# Altium PCB PCB2.PcbDoc
Units mil, origin at the board's own origin, x right, y up, seen from the top; angles counter-clockwise.
Board outline 6000 x 4000 mil, 2 copper layers (Top Layer, Bottom Layer); 33 components, 88 nets, 249 pads, 102 vias.
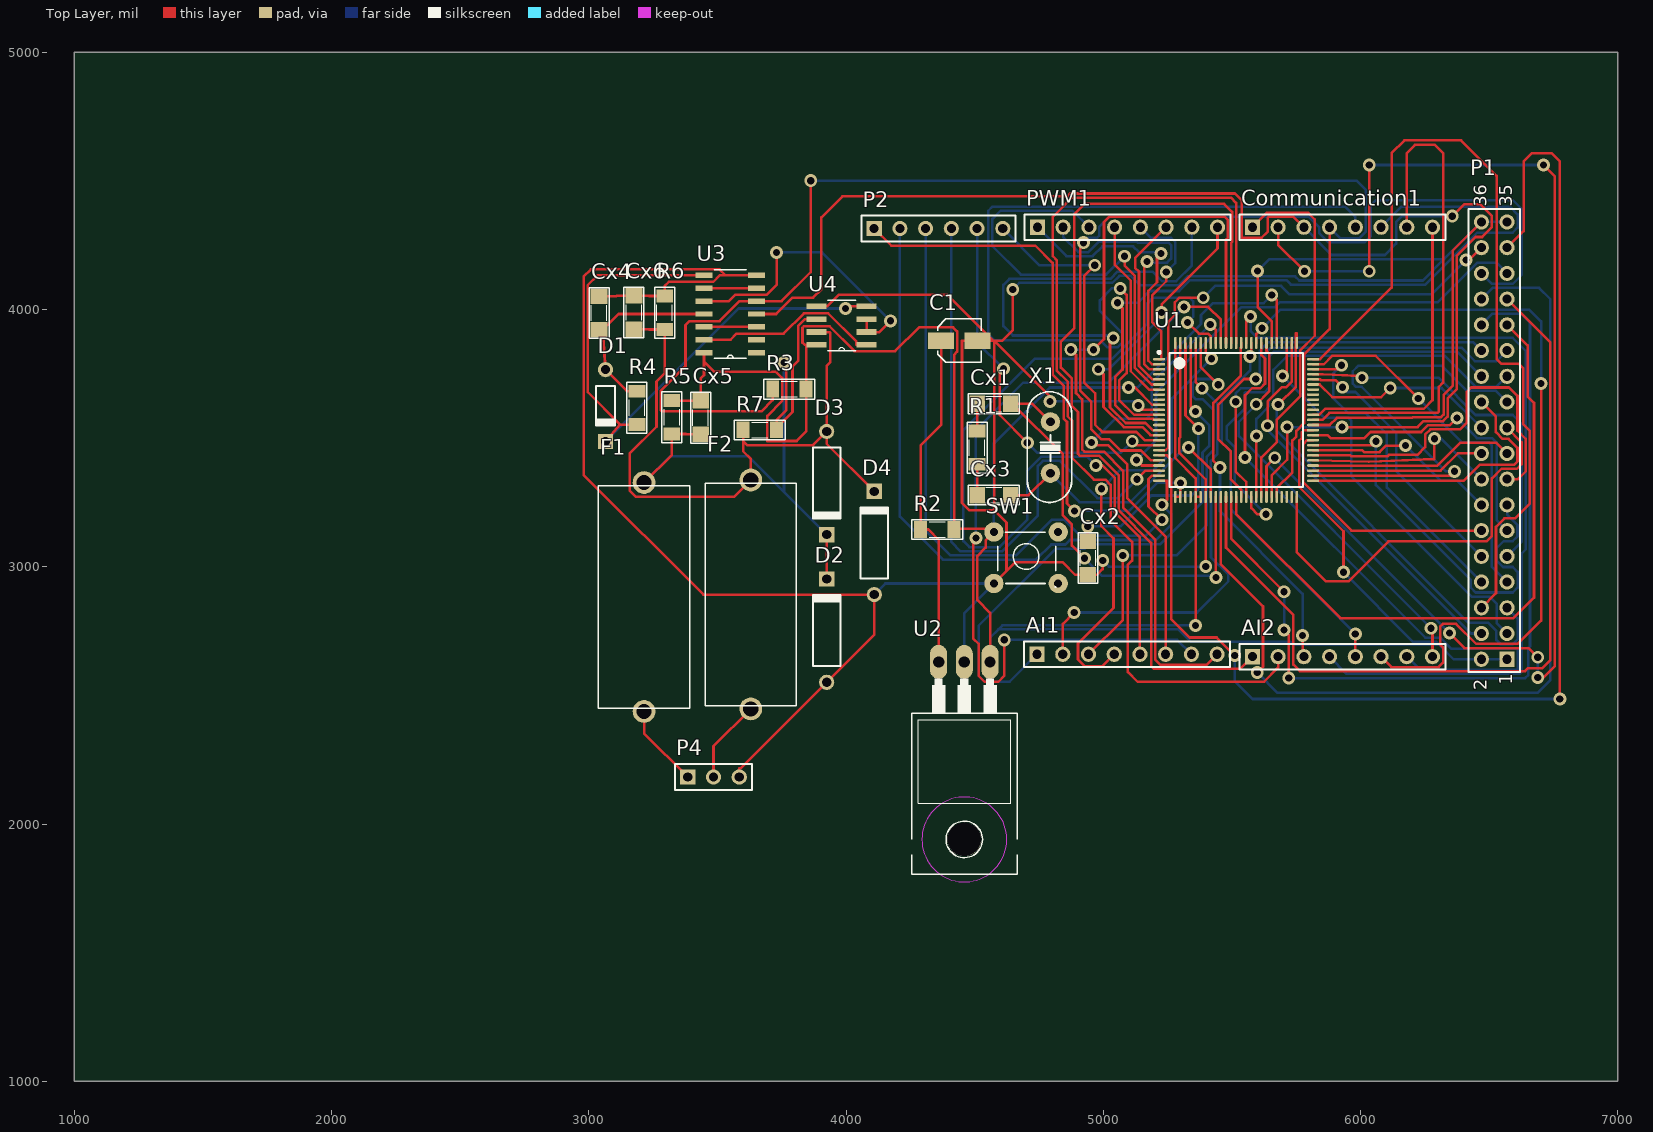
[diagram p0: Top Layer view]
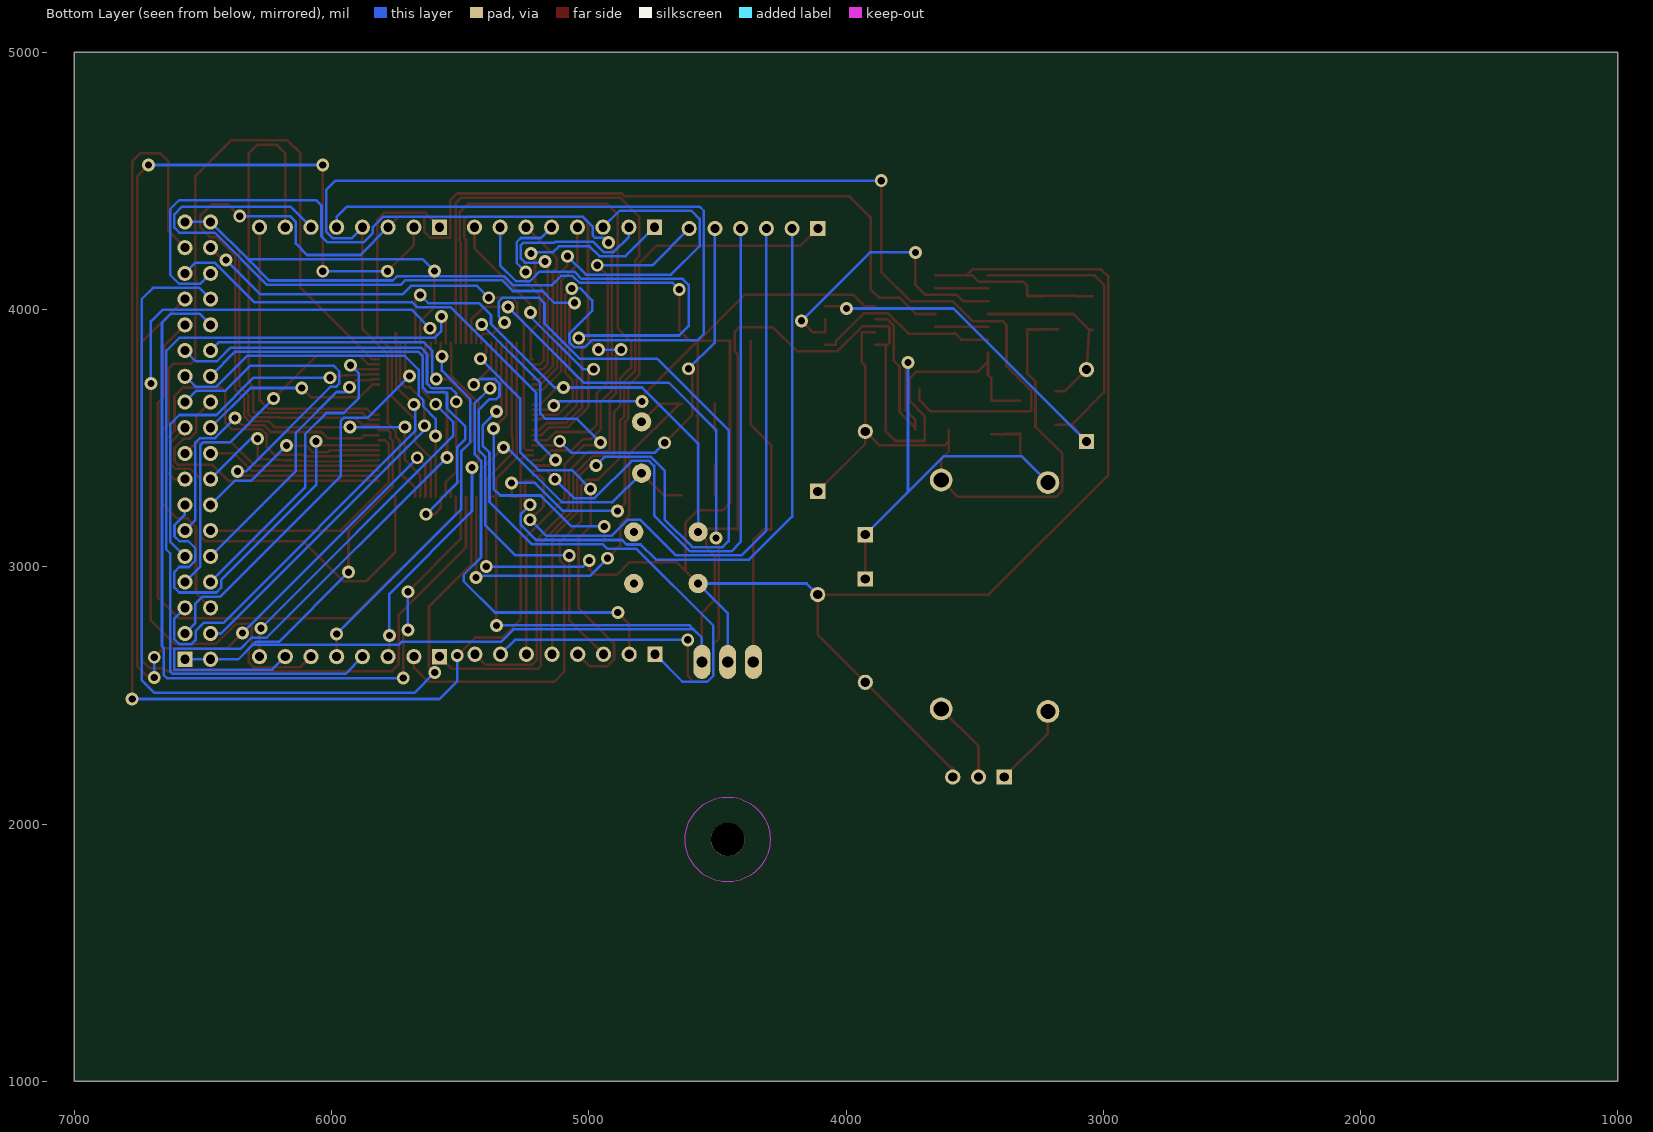
[diagram p1: Bottom Layer view, seen from below]
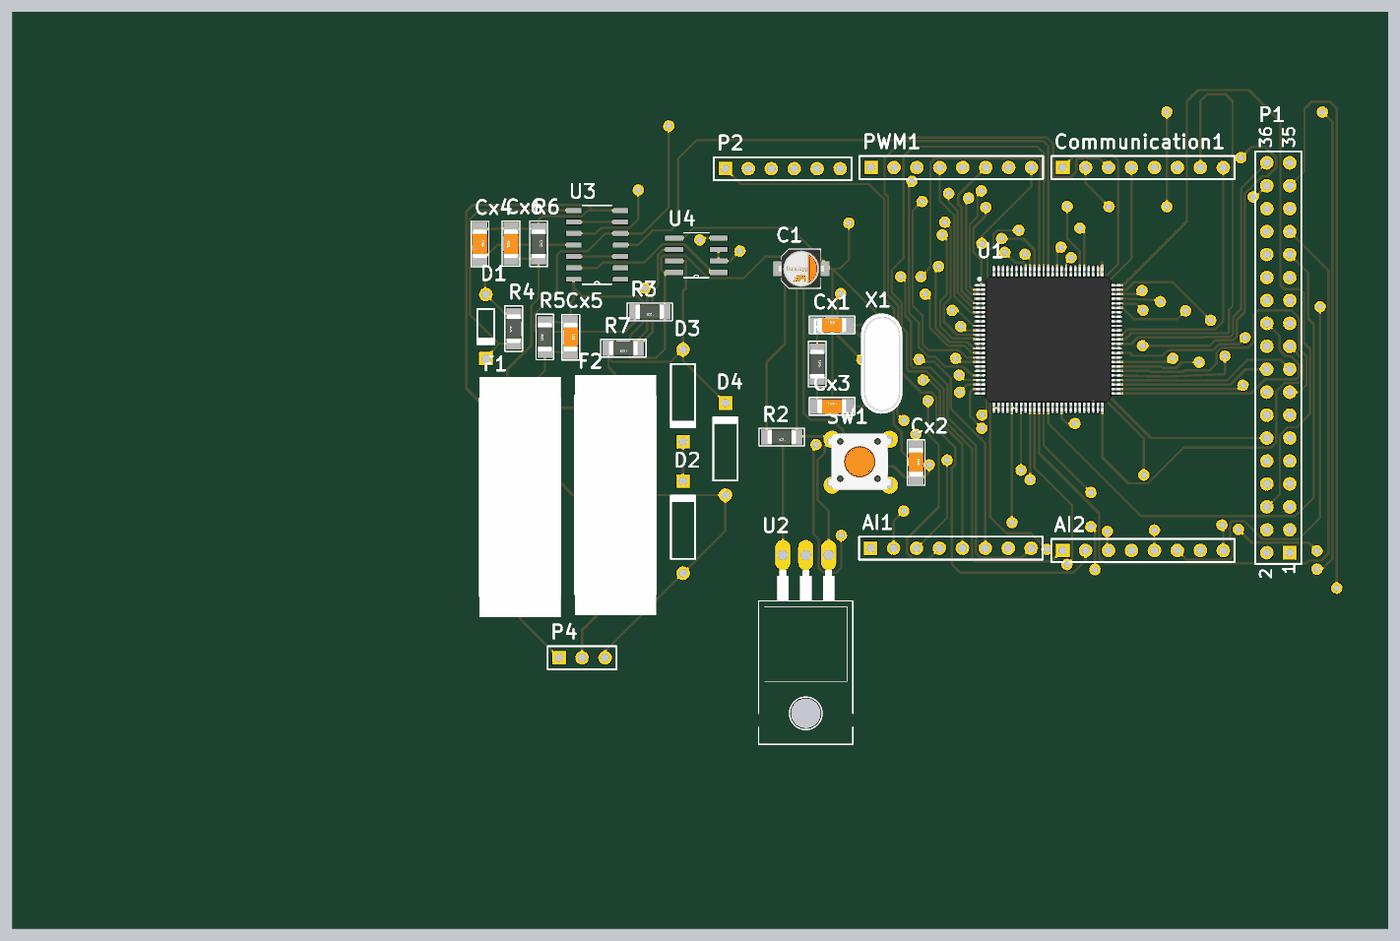
[diagram p2: 3D render of the assembled board from above, using the file's embedded part models]

## Layer stack, top to bottom
Top Solder: solder mask 0.4, Solder Resist, Dk 3.5
Top Layer: signal copper 1.4
Dielectric 1: dielectric 12.6, FR-4, Dk 4.8
Bottom Layer: signal copper 1.4
Bottom Solder: solder mask 0.4, Solder Resist, Dk 3.5

## Board outline
1000,1000 7000,1000 7000,5000 1000,5000

## Design rules (kind name [scope] priority, off if disabled: settings)
Clearance [All] p1: gap=6 ignorepadtopadclearanceinfootprint=FALSE
PolygonConnect [All] p1: connectstyle=Relief reliefconductorwidth=10 reliefentries=4 polygonreliefangle="90 Angle" airgapwidth=10
RoutingVias [All] p1: holewidth=28 width=50 viastyle="Through Hole" minholewidth=28 minwidth=50 maxholewidth=28 maxwidth=50
ShortCircuit [All] p1: allowed=TRUE
SolderMaskExpansion [All] p1: expansion=4
UnRoutedNet [All] p1: checkbadconnections=TRUE
Width [All] p1: maxlimit=10 minlimit=10 preferedwidth=10
28 further rules are at their usual default settings.

## Classes and differential pairs
component class "U_Module RS485": Cx4 Cx5 Cx6 D1 D2 D3 D4 F1 F2 P4 R3 R4 R5 R6 R7 U3 U4
component class U_Sheet1: AI1 AI2 C1 Communication1 Cx1 Cx2 Cx3 P1 P2 PWM1 R1 R2 SW1 U1 U2 X1

## Components (designator, comment, footprint, x,y, rotation, side; value= is the part's Value field where it differs from the comment)
AI1 "Header 8" HDR1X8 4742.76,2660 r0 top
AI2 "Header 8" HDR1X8 5580,2650.48 r0 top
C1 "CN-ALU-SMD" CAP-ALU-SMD-4.5x5x1.4 4440.47,3878.79 r0 top
Communication1 "Header 8" HDR1X8 5580,4320 r0 top
Cx1 "XXpF" CN-SMD-1206 4573.52,3633.34 r0 top value=22pF
Cx2 "XXpF" CN-SMD-1206 4940,3035 r270 top value=33pF
Cx3 "XXpF" CN-SMD-1206 4573.52,3278.34 r0 top value=22pF
Cx4 "XXpF" CN-SMD-1206 3040,3987.5 r270 top value=33pF
Cx5 "" CN-SMD-1206 3435,3581.01 r270 top value=1nF
Cx6 "" CN-SMD-1206 3175.48,3987.5 r90 top value=1nF
D1 "Diode 1N4148" DO-35 3065,3626.5 r270 top
D2 "Tranzorb" DO-7 3925,2751.71 r90 top
D3 "Tranzorb" DO-7 3925,3325.5 r270 top
D4 "Tranzorb" DO-7 4110,3092.5 r90 top
F1 "F1A" Fuse3 3215,2882.5 r270 top value=Fuse
F2 "F1A" Fuse3 3630,2892.5 r270 top value=Fuse
P1 "Header 18X2" HDR2X18 6570,2640.48 r90 top
P2 "Header 6" HDR1X6 4109.53,4315 r0 top
P4 "Header 3" HDR1X3 3385,2182.5 r0 top
PWM1 "Header 8" HDR1X8 4744.33,4320 r0 top
R1 "Res" RES-SMD-1206 4509.53,3463.34 r270 top value=1K
R2 "Res" RES-SMD-1206 4355,3145 r180 top
R3 "Res" RES-SMD-1206 3780,3691 r180 top value=10k
R4 "1K" RES-SMD-1206 3187.15,3617.5 r90 top
R5 "" RES-SMD-1206 3322.85,3581.01 r90 top value=1k
R6 "" RES-SMD-1206 3295,3987.5 r270 top value=1k
R7 "120" RES-SMD-1206 3665,3532.5 r180 top
SW1 "SW" SW2-DIP 4575,3135 r0 top value="Button chip 4 pin"
U1 "ATmega2560-AU" TQFP100L 5516.57,3570.8 r0 top
U2 "LM7805" *TO220 4460,2380 r180 top
U3 "74HC14D" *SOIC127P600X175-14N 3550,3982.5 r180 top
U4 "SN65176BDR" *SOIC127P600X175-8N 3983,3937.5 r180 top
X1 "12Mhz" XT2 4794.53,3463.34 r90 top value=4Mhz

## Footprints (in the part's own frame and the unit in brackets; to place one, negate y for a bottom-side part, rotate by r counter-clockwise, add the part's x,y. Pads: shape width x height; smd on the part's side, far side on the other; paste and mask are expansions set on the pad)
*SOIC127P600X175-8N [mil]
  rect 78x22 smd: 1(-97,75) 2(-97,25) 3(-97,-25) 4(-97,-75) 5(97,-75) 6(97,-25) 7(97,25) 8(97,75)
  silkscreen extent -54,-98 54,98
*SOIC127P600X175-14N [mil]
  rect 67x21 smd: 1(-102,150) 2(-102,100) 3(-102,50) 4(-102,0) 5(-102,-50) 6(-102,-100) 7(-102,-150) 8(102,-150) 9(102,-100) 10(102,-50) 11(102,0) 12(102,50) 13(102,100) 14(102,150)
  silkscreen extent -63,-172 63,172
*TO220 [mil]
  oval 66x132 hole 44: 1(-100,-250) 2(0,-250) 3(100,-250)
  round 130 hole 130 unplated: None(0,440)
  Keep-Out Layer circle w0: c0,440 r165
  Keep-Out Layer circle w0: c0,440 r165
  Keep-Out Layer circle w0: c0,440 r165
  Keep-Out Layer circle w0: c0,440 r165
  Keep-Out Layer circle w0: c0,440 r165
  Keep-Out Layer circle w0: c0,440 r165
  silkscreen extent -205,-185 205,575
CAP-ALU-SMD-4.5x5x1.4 [mm]
  rect 2.6x1.6 smd: 1(-1.8,0) 2(1.8,0)
  silkscreen extent -2.15,-2.15 2.15,2.15, body extent -2.5,-2.15 2.5,2.15, height 5.45
CN-SMD-1206 [mil]
  rect 60x65 smd: 1(-64,0) 2(66,0)
  silkscreen extent -98,-38 100,39, body extent -63,-31 63,32, height 40
DO-7 [mm] "Diode, Axial; Body 7 x 2.7 mm (LxDia. max), Lead Dia. 0.53 mm (max)"
  round 1.5 hole 0.9: 1(-5.1,0)
  rect 1.5x1.5 hole 0.9: 2(5.1,0)
  silkscreen extent -3.5,-1.35 3.6,1.35
DO-35 [mm] "Diode, Axial; Body 3.8 x 1.9 mm (LxDia. max), Lead Dia. 0.53 mm (max)"
  round 1.5 hole 0.9: 1(-3.55,0)
  rect 1.5x1.5 hole 0.9: 2(3.55,0)
  silkscreen extent -1.95,-0.95 2.05,0.95
Fuse3 [mm] "FUSEHOLDER BLOCKS - PCB - CLIP COVER - THT - WR-FSH"
  round 2.25 hole 1.5: 1(-11.3,0) 2(11.3,0)
  silkscreen extent -11,-4.5 11,4.5, body extent -13.3,-4.5 13.3,4.5, height 28.11
HDR1X3 [mm] "Connector; Header; 3 Position"
  rect 1.5x1.5 hole 0.9: 1(0,0)
  round 1.5 hole 0.9: 2(2.54,0) 3(5.08,0)
  silkscreen extent -1.27,-1.27 6.35,1.27
HDR1X6 [mm] "Connector; Header; 6 Position"
  rect 1.5x1.5 hole 0.9: 1(0,0)
  round 1.5 hole 0.9: 2(2.54,0) 3(5.08,0) 4(7.62,0) 5(10.16,0) 6(12.7,0)
  silkscreen extent -1.27,-1.27 13.97,1.27
HDR1X8 [mm] "Connector; Header; 8 Position"
  rect 1.5x1.5 hole 0.9: 1(0,0)
  round 1.5 hole 0.9: 2(2.54,0) 3(5.08,0) 4(7.62,0) 5(10.16,0) 6(12.7,0) 7(15.24,0) 8(17.78,0)
  silkscreen extent -1.27,-1.27 19.05,1.27
HDR2X18 [mm] "Connector; Header; 18x2 Position"
  rect 1.5x1.5 hole 0.9: 1(0,0)
  round 1.5 hole 0.9: 2(0,2.54) 3(2.54,0) 4(2.54,2.54) 5(5.08,0) 6(5.08,2.54) 7(7.62,0) 8(7.62,2.54) 9(10.16,0) 10(10.16,2.54) 11(12.7,0) 12(12.7,2.54) 13(15.24,0) 14(15.24,2.54) 15(17.78,0) 16(17.78,2.54) 17(20.32,0) 18(20.32,2.54) 19(22.86,0) 20(22.86,2.54) 21(25.4,0) 22(25.4,2.54) 23(27.94,0) 24(27.94,2.54) 25(30.48,0) 26(30.48,2.54) 27(33.02,0) 28(33.02,2.54) 29(35.56,0) 30(35.56,2.54) 31(38.1,0) 32(38.1,2.54) 33(40.64,0) 34(40.64,2.54) 35(43.18,0) 36(43.18,2.54)
  silkscreen extent -1.27,-1.27 44.45,3.81
RES-SMD-1206 [mil]
  rect 50x65 smd: 1(-65,0) 2(65,0)
  silkscreen extent -99,-38 99,39, body extent -63,-31 63,32, height 40
SW2-DIP [mil] "SW button 4pin, 250 x250 mil"
  round 75 hole 31: 1(0,0) 2(0,-200) 3(250,-200) 4(250,0)
  silkscreen extent 15,-215 240,0, body extent -36,-220 276,24, height 276
TQFP100L [mm] "TQFP, 100-Leads, Body 14.00x14.00mm, Pitch 0.50mm, IPC High Density"
  oval 1.2x0.25 smd: 1(-7.6,6) 2(-7.6,5.5) 3(-7.6,5) 4(-7.6,4.5) 5(-7.6,4) 6(-7.6,3.5) 7(-7.6,3) 8(-7.6,2.5) 9(-7.6,2) 10(-7.6,1.5) 11(-7.6,1) 12(-7.6,0.5) 13(-7.6,0) 14(-7.6,-0.5) 15(-7.6,-1) 16(-7.6,-1.5) 17(-7.6,-2) 18(-7.6,-2.5) 19(-7.6,-3) 20(-7.6,-3.5) 21(-7.6,-4) 22(-7.6,-4.5) 23(-7.6,-5) 24(-7.6,-5.5) 25(-7.6,-6) 51(7.6,-6) 52(7.6,-5.5) 53(7.6,-5) 54(7.6,-4.5) 55(7.6,-4) 56(7.6,-3.5) 57(7.6,-3) 58(7.6,-2.5) 59(7.6,-2) 60(7.6,-1.5) 61(7.6,-1) 62(7.6,-0.5) 63(7.6,0) 64(7.6,0.5) 65(7.6,1) 66(7.6,1.5) 67(7.6,2) 68(7.6,2.5) 69(7.6,3) 70(7.6,3.5) 71(7.6,4) 72(7.6,4.5) 73(7.6,5) 74(7.6,5.5) 75(7.6,6)
  oval 0.25x1.2 smd: 26(-6,-7.6) 27(-5.5,-7.6) 28(-5,-7.6) 29(-4.5,-7.6) 30(-4,-7.6) 31(-3.5,-7.6) 32(-3,-7.6) 33(-2.5,-7.6) 34(-2,-7.6) 35(-1.5,-7.6) 36(-1,-7.6) 37(-0.5,-7.6) 38(0,-7.6) 39(0.5,-7.6) 40(1,-7.6) 41(1.5,-7.6) 42(2,-7.6) 43(2.5,-7.6) 44(3,-7.6) 45(3.5,-7.6) 46(4,-7.6) 47(4.5,-7.6) 48(5,-7.6) 49(5.5,-7.6) 50(6,-7.6) 76(6,7.6) 77(5.5,7.6) 78(5,7.6) 79(4.5,7.6) 80(4,7.6) 81(3.5,7.6) 82(3,7.6) 83(2.5,7.6) 84(2,7.6) 85(1.5,7.6) 86(1,7.6) 87(0.5,7.6) 88(0,7.6) 89(-0.5,7.6) 90(-1,7.6) 91(-1.5,7.6) 92(-2,7.6) 93(-2.5,7.6) 94(-3,7.6) 95(-3.5,7.6) 96(-4,7.6) 97(-4.5,7.6) 98(-5,7.6) 99(-5.5,7.6) 100(-6,7.6)
  silkscreen extent -7.72,-6.6 6.6,6.8, body extent -8,-8 8,8, height 1.2
XT2 [mil] "Footpin for Crystal 2 pin"
  round 75 hole 34: 1(-100,0) 2(100,0)
  silkscreen extent -213,-83 217,90, body extent -216,-87 216,90, height 144

## Part data
AI1 AI2 Communication1 PWM1: "Header, 8-Pin", LatestRevisionDate=17-Jul-2002, LatestRevisionNote="Re-released for DXP Platform.", Publisher="Altium Limited"
C1: "Polarized Capacitor (Axial)", LatestRevisionDate=17-Jul-2002, LatestRevisionNote="Re-released for DXP Platform.", PackageReference=POLAR0.8, Published=8-Jun-2000, Publisher="Altium Limited"
Cx1 Cx2 Cx3 Cx4 Cx5 Cx6: library part CN
D1: "High Conductance Fast Diode", Code_JEDEC=DO-204-AH, ComponentLink1Description="Manufacturer Link", ComponentLink1URL=http://www.fairchildsemi.com/, ComponentLink2Description=Datasheet, ComponentLink2URL=http://www.fairchildsemi.com/ds/1N%2F1N4148.pdf, DatasheetVersion=1997, LatestRevisionDate=17-Jul-2002, LatestRevisionNote="Re-released for DXP Platform.", PackageDescription="Diode, Axial; Body 3.8 x 1.9 mm (LxDia. max), Lead Dia. 0.53 mm (max)", PackageReference=DO-35, Published=8-Jun-2000, Publisher="Altium Limited"
D2 D3 D4: "Transient Voltage Suppression (TVS) Diode", LatestRevisionDate=17-Jul-2002, LatestRevisionNote="Re-released for DXP Platform.", PackageDescription="Axial Lead Diode", PackageReference=DO-7, Published=24-Mar-1999, Publisher="Altium Limited"
F1 F2: library part Fuse, "Fuse", Designed by=VanDungEvn
P1: "Header, 18-Pin, Dual row", LatestRevisionDate=17-Jul-2002, LatestRevisionNote="Re-released for DXP Platform.", Publisher="Altium Limited"
P2: "Header, 6-Pin", LatestRevisionDate=17-Jul-2002, LatestRevisionNote="Re-released for DXP Platform.", Publisher="Altium Limited"
P4: "Header, 3-Pin", LatestRevisionDate=17-Jul-2002, LatestRevisionNote="Re-released for DXP Platform.", Publisher="Altium Limited"
R1 R2 R3 R4 R5 R6 R7: library part Res-SMD, "Resistor", Manufacturer="Generic Components", Class=Passive, Published=08/06/2000, Publisher="Altium Hobart Technology Centre"
SW1: library part SW4, "Switch button 4 pin"
U1: "8-bit AVR Microcontroller, 4.5-5.5V, 256KB Flash, 4KB EEPROM, 8KB SRAM, 86 GPIO pins, 100-pin TQFP, Industrial Grade (-40°C to 85°C), Pb-Free", Supplier Part Number 1=ATMEGA2560-16AUR-ND, Supplier 1=Digi-Key
U2: Package="TO-220 Texas Instruments", Availability=Unavailable, MF="Texas Instruments", MP=LM7805, Price=None, SnapEDA_Link=https://www.snapeda.com/parts/LM7805/Texas%20Instruments/view-part/?ref=snap
U3: "74HC CMOS logic IC series SOIC14 Hex Schmitt Inverter", Package="SOIC-14 Toshiba", Digi-Key_Part_Number=74HC14DCT-ND, Digi-Key_Purchase_URL=https://www.digikey.vn/product-detail/en/toshiba-semiconductor-and-storage/74HC14D/74HC14DCT-ND/6109122?utm_source=snapeda&utm_medium=aggregator&utm_campaign=symbol, MF="Toshiba Semiconductor", MP=74HC14D, SnapEDA_Link=https://www.snapeda.com/parts/74HC14D/Toshiba%20Semiconductor%20and%20Storage/view-part/?ref=snap
U4: "Single Transmitter/Receiver RS-422/RS-485 8-Pin SOIC T/R", Package="SOIC-8 Texas Instruments", Digi-Key_Part_Number=296-14636-1-ND, Digi-Key_Purchase_URL=https://www.digikey.vn/product-detail/en/texas-instruments/SN65176BDR/296-14636-1-ND/555935?utm_source=snapeda&utm_medium=aggregator&utm_campaign=symbol, MF="Texas Instruments", MP=SN65176BDR, SnapEDA_Link=https://www.snapeda.com/parts/SN65176BDR/Texas%20Instruments/view-part/?ref=snap
X1: library part XT2, "Crystal, 32.768 KHz, -40 to 85 degC, 3.2 x 1.5 x 0.9 mm SMD"

## Via types
v1: diameter 50, hole 28, Top Layer to Bottom Layer, 102 vias

## Nets (pads, with @x,y where several pads share a name; then routed paths per layer and width w, separated by ;. In a path a pad name is that pad's centre, name@x,y a point inside that pad or via, vN(x,y) a via of type N, cw(c..) or ccw(c..) an arc to the next point about the centre after c; other vN are vias at no path point)
A0: AI1.1 U1.97 | length 2203.6
  Top Layer w10: U1.97 5339.41,3623.18 v1(5359,3603.59)
  Bottom Layer w10: AI1.1 4635.76,2553 4539,2553 4516,2576 4516,2771 4815.5,3070.5 4928.5,3070.5 4945.94,3087.94 5221.72,3087.94 5386,3252.23 5386,3443.52 5412,3469.52 5412,3550.59 v1(5359,3603.59)
A1: AI1.2 U1.96 | length 1830.7
  Top Layer w10: AI1.2 4842.76,2778 v1(4887,2822.24) ; U1.96 5359.09,3718.91 v1(5384,3694)
  Bottom Layer w10: v1(4887,2822.24) 5365.24,2822.24 5486,2943 5486,2969 5419,3036 5419,3362 5418,3363 5418,3412 5444,3438 5444,3634 v1(5384,3694)
A2: AI1.3 U1.95 | length 1732.2
  Top Layer w10: AI1.3 5076,2793.24 v1(5076,3044) ; U1.95 5378.78,3776 v1(5446.89,3707.89)
  Bottom Layer w10: v1(5076,3044) 5285,3044 5403,3162 5403,3346 5402,3347 5402,3427.52 5428,3453.52 5428,3609.58 5385.58,3652 5359,3652 5347,3664 5347,3712 5365,3730 5424.78,3730 v1(5446.89,3707.89)
A3: AI1.4 U1.94 | length 1740.1
  Top Layer w10: v1(4993,3303) 4993,3157.53 5040,3110.53 5040,2840 4902,2702 4902,2640 4928,2614 4996.76,2614 AI1.4 ; U1.94 5398.46,3831.54 v1(5421.19,3808.81)
  Bottom Layer w10: v1(4993,3303) 5066,3376 5196,3376 5267,3447 5267,3654.63 v1(5421.19,3808.81)
A4: AI1.5 U1.93 | length 3434.7
  Top Layer w10: v1(4971.27,3393.73) 4996.27,3393.73 5045,3345 5045,3210.76 5142.76,3113 AI1.5 ; v1(5328,3950) 5372,3906 5408.15,3906 5418.15,3896 U1.93
  Bottom Layer w10: v1(4971.27,3393.73) 4937.16,3427.84 4759.24,3427.84 4705,3373.6 4705,3183.5 4597.5,3076 4480,3076 4456.38,3099.62 4456.38,3531.38 4733,3808 5033.63,3808 5172,3946.37 5172,4024 5194,4046 5336,4046 5350,4032 5350,3972 v1(5328,3950)
A5: AI1.6 U1.92 | length 1778.1
  Top Layer w10: v1(4953.88,3483.44) 4964.24,3473.08 5019.17,3473.08 5093,3399.24 5093,3267.03 5242.76,3117.28 AI1.6 ; v1(5416,3942) 5437.83,3920.17 U1.92
  Bottom Layer w10: v1(4953.88,3483.44) 5045.44,3575 5168,3575 5188,3595 5188,3714 v1(5416,3942)
A6: AI1.7 U1.91 | length 3240.2
  Top Layer w10: v1(4505,3112) 4494,3101 4494,2722 4516,2700 4516,2576 4539,2553 4592,2553 4615,2576 v1(4615,2716) ; v1(5314,4010) 5408,4010 5457.52,3960.48 U1.91
  Bottom Layer w10: v1(4505,3112) 4505,3532 4689,3716 5020,3716 v1(5314,4010) ; v1(4615,2716) 5286.76,2716 AI1.7
A7: AI1.8 U1.90 | length 3228.8
  Top Layer w10: v1(4874,3844) 4894,3824 4894,3675 4917.88,3651.12 4917.88,3456 4926.44,3447.44 5002.16,3447.44 5077,3372.6 5077,3230.74 5202,3105.74 5202,2640 5223,2619 5401.76,2619 AI1.8 ; v1(4962,3844) 5003,3885 5003,4340 5024,4361 5472,4361 5484.86,4348.14 5484.86,4279 5477.2,4271.34 U1.90
  Bottom Layer w10: v1(4874,3844) v1(4962,3844)
A8: AI2.1 U1.89 | length 3539.9
  Top Layer w10: U1.89 5496.89,4259.5 5500.86,4263.47 5500.86,4380 5469.86,4411 4928,4411 4887,4370 4887,3927 4835,3875 4835,3774 4878,3731 4878,3625.37 4901.88,3601.49 4901.88,3440 4910.44,3431.44 4984.97,3431.44 5061,3355.41 5061,3218 5186,3093 5186,2614.42 5197.42,2603 5532.52,2603 AI2.1
A9: AI2.2 U1.88 | length 3891.7
  Top Layer w10: U1.88 5516.57,4247.47 5516.86,4247.76 5516.86,4414.03 5495.89,4435 4878.28,4435 4803.8,4360.53 4803.8,4207.47 4819,4192.28 4819,3763 4862,3720 4862,3584.7 4878.65,3568.05 4878.65,3423.8 4963.46,3339 5008,3339 5029,3318 5029,3180 5112,3097 5112,3024 5096,3008 5096,2591 5134,2553 5625.04,2553 5680,2607.96 AI2.2
A10: AI2.3 U1.87 | length 1410.9
  Top Layer w10: v1(5454,3386) 5428,3412 5428,3637 5535,3744 5535,3851 5536.26,3851 U1.87 ; v1(5775,2733) 5775,2655.48 AI2.3
  Bottom Layer w10: v1(5454,3386) 5454,3216 5775,2895 v1(5775,2733)
A11: AI2.4 U1.86 | length 3299.2
  Top Layer w10: U1.86 5555.94,3955.94 v1(5573,3973)
  Bottom Layer w10: v1(5573,3973) 5573,3917 5600,3890 6592,3890 6642.53,3839.47 6642.53,3067.96 6627,3052.43 6627,2592.47 6618.48,2583.96 5946.53,2583.96 AI2.4
A12: AI2.5 U1.85 | length 1482.8
  Top Layer w10: v1(5571,3818) 5575.63,3822.63 U1.85 ; AI2.5 v1(5980,2739.1)
  Bottom Layer w10: v1(5571,3818) 5571,3762.16 5460,3651.16 5460,3484 5496,3448 5496,3223.1 v1(5980,2739.1)
A13: AI2.6 U1.84 | length 3239.8
  Top Layer w10: U1.84 5595.32,3905.32 v1(5617,3927) ; AI2.6 6120.53,2609.96 6304,2609.96 6321,2626.96 6321,2687 6310,2698 6310,2768 6320,2778 6372,2778 6450.04,2699.96 6611,2699.96 6702,2790.96 v1(6702,3713)
  Bottom Layer w10: v1(5617,3927) 5689.96,3999.96 6656,3999.96 6702,3953.96 v1(6702,3713)
A14: AI2.7 U1.83 | length 2403.6
  Top Layer w10: v1(5551,3425) 5551,3666 5579,3694 5611,3694 5629,3712 5629,3809 5615,3823 U1.83
  Bottom Layer w10: v1(5551,3425) 6252,2724 6310.81,2724 6352.81,2682 6611,2682 6611,2599.96 6230.53,2599.96 AI2.7
A15: AI2.8 U1.82 | length 1584.6
  Top Layer w10: v1(5595,3631.78) 5645,3681.78 5645,3828.69 5634.69,3839 U1.82 ; v1(6274,2761) 6280,2755 AI2.8
  Bottom Layer w10: v1(5595,3631.78) 5527,3563.78 5527,3508 v1(6274,2761)
"D0 (RX0)": PWM1.1 U1.2 | length 1040.2
  Top Layer w10: U1.2 5189,3787.33 5175,3801.33 5175,4072 5209,4106 5209,4202 v1(5225,4218)
  Bottom Layer w10: PWM1.1 4856.86,4207.47 4958.47,4207.47 4996.78,4245.78 5116.33,4245.78 5139,4223.1 5219.9,4223.1 v1(5225,4218)
"D1 (TX0)": PWM1.2 U1.3 | length 1128.1
  Top Layer w10: v1(5170,4187) 5159,4176 5159,3788.41 5179.76,3767.65 U1.3
  Bottom Layer w10: PWM1.2 4844.33,4282.67 4903.53,4223.47 4942.47,4223.47 4982,4263 5131.11,4263 5135.11,4259 5255,4259 5264,4250 5264,4198 5248,4182 5175,4182 v1(5170,4187)
"D2 (PWM)": PWM1.3 U1.6 | length 1681.8
  Top Layer w10: v1(5083,4207) 5083,4171 5123,4131 5123,3773.52 5187.92,3708.59 U1.6
  Bottom Layer w10: PWM1.3 4880.33,4384 4601,4384 4569,4352 4569,4246 4679.53,4135.47 5011.47,4135.47 v1(5083,4207)
"D3 (PWM)": PWM1.4 U1.7 | length 725.8
  Top Layer w10: PWM1.4 5044.33,4174.67 5107,4112 5107,3760 5178.09,3688.91 U1.7
"D4 (PWM)": PWM1.5 U1.1 | length 673.3
  Top Layer w10: U1.1 5225,3807.02 5225,3916 5191,3950 5191,4056 5245,4110 v1(5245,4146)
  Bottom Layer w10: PWM1.5 5186.33,4278 5264,4278 5280,4262 5280,4181 v1(5245,4146)
"D5 (PWM)": PWM1.6 U1.5 | length 695.1
  Top Layer w10: U1.5 5192,3728.28 5139,3781.28 5139,4147 5124,4162 5124,4199.67 PWM1.6
"D6 (PWM)": PWM1.7 U1.15 | length 2051.1
  Top Layer w10: v1(5039,3889) 5026.43,3876.43 5026.43,3620.03 5087.47,3559 5164.43,3559 5192,3531.43 U1.15
  Bottom Layer w10: v1(5039,3889) 5029,3899 4649,3899 4612,3936 4612,4096 4635.47,4119.47 5028.37,4119.47 5055.9,4147 5192,4147 5229,4110 5283,4110 5344.33,4171.33 PWM1.7
"D7 (PWM)": PWM1.8 U1.16 | length 1184.9
  Top Layer w10: v1(4981,3768) 5001,3748 5001,3621.89 5079.89,3543 5152,3543 5183.26,3511.74 U1.16 ; v1(5227,3988) 5227,4020 5444.33,4237.33 PWM1.8
  Bottom Layer w10: v1(4981,3768) 5023,3768 5227,3972 v1(5227,3988)
"D8 (PWM)": P2.6 U1.17 | length 1345
  Top Layer w10: v1(4967,4172) 4926,4131 4926,3717 4969,3674 4969,3551.52 4996.52,3524 5129,3524 5160.94,3492.06 U1.17
  Bottom Layer w10: P2.6 4752.53,4172 v1(4967,4172)
"D9 (PWM)": P2.5 U1.18 | length 1478.5
  Top Layer w10: v1(4612,3770) 4598,3756 4598,3589 v1(4705,3482) ; v1(5113,3488) 5128.63,3472.37 U1.18
  Bottom Layer w10: P2.5 4509.53,3872.47 v1(4612,3770) ; v1(4705,3482) 4743.16,3443.84 5068.84,3443.84 v1(5113,3488)
"D10 (PWM)": P2.4 U1.23 | length 2404.5
  Top Layer w10: v1(5131,3340) 5164.95,3373.95 U1.23
  Bottom Layer w10: P2.4 4409.53,3096.47 4446,3060 4606.97,3060 4746.03,3199.06 4746.03,3392 4765.87,3411.84 4832,3411.84 4976.84,3267 5058,3267 v1(5131,3340)
"D11 (PWM)": P2.3 U1.24 | length 2469.6
  Top Layer w10: U1.24 5189.26,3354.26 5176,3341 5176,3235 v1(5228,3183)
  Bottom Layer w10: P2.3 4309.53,3140.47 4406,3044 4660.5,3044 4800,3183.5 4848,3183.5 4911.56,3119.94 5164.94,3119.94 v1(5228,3183)
"D12 (PWM)": P2.2 U1.25 | length 2524.7
  Top Layer w10: U1.25 5248,3334.58 5248,3261 v1(5228,3241)
  Bottom Layer w10: P2.2 4209.53,3195.47 4377,3028 4739.5,3028 4798,3086.5 4852.5,3086.5 4869.94,3103.94 5204.94,3103.94 5264,3163 5264,3205 v1(5228,3241)
"D13 (PWM)": P2.1 U1.26 U1.27 | length 2279.5
  Top Layer w10: P2.1 4176.53,4248 4736,4248 4803,4181 4803,3747 4846,3704 4846,3576 4859.03,3562.98 4859.03,3245.97 v1(4888,3217) ; U1.26 U1.27 v1(5300.04,3326)
  Bottom Layer w10: v1(4888,3217) 5100,3217 5209,3326 v1(5300.04,3326)
"D14 (TX3)": Communication1.8 U1.64 | length 1160
  Top Layer w10: U1.64 5839.48,3590.48 5863,3614 6246,3614 6280,3648 Communication1.8
"D15 (RX3)": Communication1.7 U1.63 | length 1969.7
  Top Layer w10: U1.63 5851.8,3570.8 5879,3598 6300,3598 6304.28,3602.28 6304.28,3699.05 6321,3715.76 6321,4608 6289,4640 6212,4640 6180,4608 Communication1.7
"D16 (TX2)": Communication1.6 U1.13 | length 2933.8
  Top Layer w10: v1(5055,4026) 5075,4006 5075,3766.53 5046,3737.53 5046,3629 5100,3575 5194.41,3575 5194.41,3570.8 U1.13
  Bottom Layer w10: v1(5055,4026) 5134.21,4026 5180.21,4072 5295.12,4072 5336.12,4113 5713.96,4113 5730,4096.96 6251.96,4096.96 6454,4299 6592,4299 6611,4318 6611,4370 6581.28,4399.72 6159.72,4399.72 Communication1.6
"D17 (RX2)": Communication1.5 U1.12 | length 3453.9
  Top Layer w10: v1(5066,4082) 5091,4057 5091,3753 5062,3724 5062,3649 5120,3591 5198.48,3591 U1.12
  Bottom Layer w10: v1(5066,4082) 5033,4082 4987,4036 4987,3995 5075,3907 5075,3872 5056,3853 5017,3853 4990,3880 4578,3880 4553,3905 4553,4384 4569,4400 5940,4400 5980,4360 Communication1.5
"D18 (TX1)": Communication1.4 R3.2 U1.46 U3.5 | length 5434.1
  Top Layer w10: R3.2 3715,3648 3671,3604 3285.35,3604 3279.35,3610 3279.35,3683 3376,3779.65 3376,3939 3392,3955 3509,3955 3586.5,4032.5 U3.5 3750.15,4032.5 3863,4145.35 v1(3863,4501) ; U1.46 5674.06,3305.42 5735,3366.36 5735,3491.13 5751,3507.13 5751,3528.39 5781.11,3558.5 5781.11,3825 5880,3923.89 Communication1.4
  Bottom Layer w10: v1(3863,4501) 5984,4501 6021,4464 6021,4303 5995,4277 5923,4277 Communication1.4
"D19 (RX1)": Communication1.3 U1.45 U3.4 | length 5453.1
  Top Layer w10: U3.4 3728.5,3982.5 3792,4046 3872,4046 3904,4078 3904,4358 3986,4440 4860.65,4440 4871.65,4451 5511.65,4451 5539,4423.65 5539,4279 5616,4279 5639,4302 5639,4356 5643.53,4360.53 5739.47,4360.53 Communication1.3 ; U1.45 5654.37,3355.37 5715,3416 v1(5715,3543) ; v1(5928,3543) 6222.48,3543 6245.48,3566 6321,3566 6339,3584 6339,3654.54 6374,3689.54 6374,4208 6448,4282 6473,4282 6511,4320 6511,4363 6464,4410 6404,4410 v1(6357,4363)
  Bottom Layer w10: v1(5715,3543) v1(5928,3543) ; Communication1.3 5888,4212 6095,4212 6139,4256 6139,4340 6162,4363 v1(6357,4363)
"D20 (SDA)": Communication1.2 U1.44 | length 5198.3
  Top Layer w10: U1.44 5634.69,3391.69 v1(5667,3424) ; Communication1.2 5680,4251 v1(5782,4149) ; v1(6034,4149) v1(6034,4562) ; v1(6346,2742) 6404.04,2683.96 6653.04,2683.96 v1(6689,2648) ; v1(6689,2569) 6711.33,2569 6756,2613.67 6756,4518 v1(6712,4562)
  Bottom Layer w10: v1(5667,3424) 5667,3421 v1(6346,2742) ; v1(5782,4149) v1(6034,4149) ; v1(6034,4562) v1(6712,4562) ; v1(6689,2569) v1(6689,2648)
"D21 (SCL)": Communication1.1 U1.43 | length 1441.3
  Top Layer w10: Communication1.1 5636.53,4376.53 5796.47,4376.53 5822.22,4350.78 5822.22,3898.11 5765.11,3841 5765.11,3662.11 5675,3572 5675,3485 5615,3425 U1.43
D22: P1.3 U1.78 | length 1593.4
  Top Layer w10: v1(5697,3742) 5713.43,3758.43 U1.78
  Bottom Layer w10: v1(5697,3742) 5860,3579 5953,3579 5964,3568 5964,3351.96 6432,2883.96 6502.04,2883.96 6529,2857 6529,2781.48 P1.3
D23: P1.4 U1.77 | length 1546.2
  Top Layer w10: v1(5639,3548) 5639,3643 5694.36,3698.36 5712,3698.36 5733.11,3719.47 U1.77
  Bottom Layer w10: v1(5639,3548) 5639,3532 6430.52,2740.48 P1.4
D24: P1.5 U1.76 | length 1901.7
  Top Layer w10: v1(5680,3630.36) 5749.11,3699.47 5749.11,3907.08 5752.8,3907.08 U1.76
  Bottom Layer w10: v1(5680,3630.36) 5675,3630.36 5675,3527.36 6420.36,2782 6497,2782 6528,2751 6528,2715 6544,2699 6592,2699 6611,2718 6611,2799.48 P1.5
D25: P1.6 U1.75 | length 3303.2
  Top Layer w10: U1.75 5843.02,3807.02 6121,4085 6121,4608 6171,4658 6391,4658 6529,4520 6529,3808 6547,3790 6614,3790 6632,3772 6632,3554.53 6658.53,3528 6658.53,3246.53 6600,3188 6560,3188 6527,3155 6527,2897.48 P1.6
D26: P1.7 U1.74 | length 1408.6
  Top Layer w10: U1.74 5857.68,3787.33 5890,3819.65 6059.35,3819.65 v1(6225,3654)
  Bottom Layer w10: v1(6225,3654) 6395.04,3483.96 6499.04,3483.96 6511,3472 6511,2999.48 P1.7
D27: P1.8 U1.73 | length 1251.3
  Top Layer w10: U1.73 5910,3767.65 v1(5926,3783.65)
  Bottom Layer w10: v1(5926,3783.65) 5894,3751.65 5894,3656.3 5952.5,3597.8 6019.82,3597.8 6102.5,3515.12 6102.5,3307.98 P1.8
D28: P1.9 U1.72 | length 1426.4
  Top Layer w10: U1.72 5853,3747.96 5999.45,3741.55 v1(6006,3735)
  Bottom Layer w10: v1(6006,3735) 6303,3735 6448,3590 6592,3590 6626.53,3555.47 6626.53,3097.01 P1.9
D29: P1.10 U1.71 | length 1026.7
  Top Layer w10: U1.71 5842.72,3728.28 5845.45,3725.55 5902.45,3725.55 v1(5930,3698)
  Bottom Layer w10: v1(5930,3698) 5948.52,3679.48 5980.52,3679.48 6139,3521 6139,3371.48 P1.10
D30: P1.11 U1.60 | length 1150
  Top Layer w10: U1.60 5872.26,3511.74 5884.95,3499.05 6014.44,3499.05 6039.38,3524 6235.48,3524 6261.48,3550 6347,3550 v1(6375,3578)
  Bottom Layer w10: v1(6375,3578) 6453.04,3499.96 6512,3499.96 6529,3482.96 6529,3181.48 P1.11
D31: P1.12 U1.59 | length 963.9
  Top Layer w10: U1.59 5792,3492.06 5778,3478.06 5778,3327 5964.52,3140.48 P1.12
D32: P1.13 U1.58 | length 1619.2
  Top Layer w10: U1.58 6044.37,3472.37 v1(6060,3488)
  Bottom Layer w10: v1(6060,3488) 6060,3318 6429.47,2948.53 6429.47,2918.48 6448,2899.96 6592,2899.96 6611,2918.96 6611,2980 6592,2999 6554,2999 6529,3024 6529,3072 6556.96,3099.96 6592,3099.96 6610.53,3118.48 6610.53,3162.48 6570,3203.01 P1.13
D33: P1.14 U1.57 | length 763
  Top Layer w10: U1.57 6007.12,3452.69 6013.99,3445.83 6074.73,3445.83 6099.91,3471 v1(6175,3471)
  Bottom Layer w10: v1(6175,3471) 6311.42,3334.58 6375.91,3334.58 P1.14
D34: P1.15 U1.56 | length 1411.1
  Top Layer w10: U1.56 5960.9,3433 5965,3428.9 6104.81,3428.9 6110.91,3435 6221,3435 6251.48,3465.48 6251.48,3513.48 6272,3534 6387.48,3534 6413.47,3559.99 6413.47,3680 6430.48,3697.01 6577.52,3697.01 6610.53,3664 6610.53,3528.86 6642.53,3496.86 6642.53,3370.87 6612.14,3340.48 P1.15
D35: P1.16 U1.55 | length 798.7
  Top Layer w10: U1.55 6032.53,3408.66 6287.48,3419 v1(6287.48,3498)
  Bottom Layer w10: v1(6287.48,3498) 6312.48,3498 P1.16
D36: P1.17 U1.54 | length 808.7
  Top Layer w10: U1.54 6008.63,3392 6297.64,3392 6387.64,3482 6528.48,3482 P1.17
D37: P1.18 U1.53 | length 681.8
  Top Layer w10: U1.53 6311.59,3373.95 6378.12,3440.48 P1.18
D38: P1.19 U1.50 | length 1620.1
  Top Layer w10: U1.50 5752.8,3056.2 5866,2943 5953,2943 6109,3099 6490,3099 6511,3120 6511,3343 6549.01,3381.01 6608,3381.01 6626.53,3399.54 6626.53,3483.96 P1.19
D39: P1.20 U1.70 | length 753.7
  Top Layer w10: U1.70 5841.41,3708.59 5891,3659 6080,3659 v1(6116,3695)
  Bottom Layer w10: v1(6116,3695) 6315.48,3695 P1.20
D40: P1.21 U1.52 | length 1810.1
  Top Layer w10: U1.52 6349.26,3354.26 v1(6366,3371)
  Bottom Layer w10: v1(6366,3371) 6333,3371 6005,3699 5983,3699 5970,3712 5970,3760 5992,3782 6315.43,3782 6413.47,3683.96 6526.53,3683.96 P1.21
D41: P1.22 U1.51 | length 1128.4
  Top Layer w10: U1.51 6401.64,3334.58 6464.07,3397.01 6598.04,3397.01 6610.53,3409.5 6610.53,3462.47 6575.99,3497.01 6552.99,3497.01 6526.53,3523.47 6526.53,3583.96 P1.22
D42: P1.23 U1.42 | length 1518.8
  Top Layer w10: U1.42 v1(5595.32,3508.68)
  Bottom Layer w10: v1(5595.32,3508.68) 5595.32,3575.32 5644,3624 5644,3649 5661,3666 5661,3765.3 5715.35,3819.65 6328.31,3819.65 6448,3699.96 6529.47,3699.96 P1.23
D43: P1.24 U1.41 | length 1771.1
  Top Layer w10: U1.41 5575.63,3228.37 5600,3204 v1(5633,3204)
  Bottom Layer w10: v1(5633,3204) 5512,3325 5512,3464 5480,3496 5480,3545 5551,3616 5551,3675.78 5553.22,3678 5627,3678 5645,3696 5645,3817 5664,3836 6374.48,3836 P1.24
"D44 (PWM)": P1.25 U1.40 | length 1654.8
  Top Layer w10: v1(5515,3641.37) 5515,3371 5555.94,3330.06 U1.40
  Bottom Layer w10: v1(5515,3641.37) 5515,3673.37 5535.63,3694 5611,3694 5629,3712 5629,3828 5653,3852 6392,3852 6445,3799 6528.52,3799 P1.25
"D45 (PWM)": P1.26 U1.39 | length 1587.3
  Top Layer w10: U1.39 5536.26,3299.74 5496,3340 5496,3447.93 5446.5,3497.42 5446.5,3628.4 5548.11,3730 v1(5593,3730)
  Bottom Layer w10: v1(5593,3730) 5609,3746 5609,3840 5642,3873 6437.48,3873 P1.26
"D46 (PWM)": P1.27 U1.38 | length 2528.7
  Top Layer w10: U1.38 5516.57,3205.89 5922.5,2799.96 6594.48,2799.96 6674.53,2880 6674.53,3636.81 6650,3661.34 6650,3860.48 P1.27
D47: P1.28 U1.37 | length 3327.8
  Top Layer w10: U1.37 5496.89,3109 v1(5703,2902.89) ; v1(5703,2754) 5721,2736 v1(5721,2567)
  Bottom Layer w10: v1(5703,2754) v1(5703,2902.89) ; v1(5721,2567) 6640,2567 6653,2580 6653,2684.08 6659,2690.08 6659,3949 6624.04,3983.96 6513.47,3983.96 P1.28
D48: P1.29 U1.36 | length 3260.8
  Top Layer w10: U1.36 5477.2,3074.26 5739,2812.46 5739,2620 5765.04,2593.96 6640.08,2593.96 6652,2605.88 6706.88,2605.88 6738.1,2637.1 6738.1,3872.39 P1.29
D49: P1.30 U1.35 | length 3736.1
  Top Layer w10: U1.35 5457.52,3009.48 5621,2846 5621,2611 v1(5599,2589)
  Bottom Layer w10: v1(5599,2589) 5678,2510 6688,2510 6738.1,2560.1 6738.1,4039.9 6694.04,4083.96 6513.47,4083.96 P1.30
"D50 (MISO)": P1.31 U1.22 | length 1982.1
  Top Layer w10: v1(5129,3415) 5150.37,3393.63 U1.22
  Bottom Layer w10: v1(5129,3415) 5205,3491 5205,3677 5537,4009 5667,4009 5687,4029 6301.2,4029 6454.2,4182 6528.48,4182 P1.31
"D51 (MOSI)": P1.32 U1.21 | length 3479.4
  Top Layer w10: v1(4923,4260) 4910,4247 4910,3685.32 4953,3642.32 4953,3535.52 4993.52,3495 5023.94,3495 5067.02,3451.92 5146.4,3451.92 5185,3413.32 U1.21
  Bottom Layer w10: v1(4923,4260) 4942,4279 4976,4279 4985,4288 4985,4322 5024,4361 5798,4361 5839,4320 5839,4297 5875,4261 6016,4261 6039,4284 6039,4404 6060,4425 6592,4425 6627,4390 6627,4134.96 6592,4099.96 6510.53,4099.96 P1.32
"D52 (SCK)": P1.33 U1.20 | length 4990.6
  Top Layer w10: U1.20 5248,3433 5264,3417 5264,2797 5336,2725 5441,2725 v1(5511,2655) ; P1.33 6634,4304.48 6634,4576 6666,4608 6743,4608 6775,4576 v1(6775,2486)
  Bottom Layer w10: v1(5511,2655) 5511,2556 5581,2486 v1(6775,2486)
"D53 (SS)": P1.34 U1.19 | length 1922.2
  Top Layer w10: U1.19 5242,3452.69 5252,3462.69 5252,3952 5278,3978 5278,4028 5296,4046 v1(5389,4046) ; v1(6410,4192) 6421.52,4192 P1.34
  Bottom Layer w10: v1(5389,4046) 5435,4092 5691,4092 5724,4059 6277,4059 v1(6410,4192)
GND: C1.2 Cx2.2 Cx4.1 Cx6.2 D2.1 D4.1 P1.35 P1.36 P4.3 R6.1 SW1.2 U1.11 U1.32 U1.62 U1.81 U1.99 U2.2 U3.7 U4.5 | length 14997.7
  Top Layer w10: Cx4.1 3106,4051.5 3108.01,4053.5 Cx6.2 3235,4052.5 R6.1 3295,4091 3312,4108 3484.5,4108 3509,4132.5 3532.5,4132.5 ; P4.3 3585,2216 3590.07,2216 D2.1 4110,2735.93 D4.1 3445.29,2891.71 2980,3357 2980,4128 3008,4156 3509,4156 3532.5,4132.5 ; U3.7 3532.5,4132.5 ; U4.5 3926.5,4012.5 3971,4057 4394,4057 4572.21,3878.79 ; SW1.2 4624,2984 ; v1(4648,4078) 4648,3918.79 4608,3878.79 4576,3878.79 ; v1(4793,3643) 4793,3661.79 4576,3878.79 ; v1(4998,3024) 4998,2991 4976,2969 Cx2.2 4891,2969 4843.27,3016.73 4656.73,3016.73 4624,2984 ; v1(5136,3627) 5152.83,3610.17 U1.11 ; U1.99 5300.04,3504.04 5296,3500 5296,3442.37 5398.46,3339.9 U1.32 v1(5398.46,3000.46) ; v1(5600,4150) 5600,4009 5654.37,3954.63 U1.81 ; U1.62 5880.11,3551.11 5908,3579 6200.48,3579 6203.48,3582 6313,3582 6323,3592 6323,3668.01 6358,3703.01 6358,4228.48 P1.36 ; 4572.21,3878.79 4576,3875 4576,3220 ; 4572.21,3878.79 4576,3878.79 ; 4572.21,3878.79 C1.2 4451,3878.79 4451,3248 4479,3220 4576,3220 ; 4576,3220 4624,3172 4624,2984
  Bottom Layer w10: D4.1 4153.29,2935 SW1.2 4460,2820 U2.2 ; v1(4648,4078) 4673.47,4103.47 5035,4103.47 5062.53,4131 5107,4131 5144,4094 5293.38,4094 5328.38,4129 5746,4129 5762.04,4112.96 6242.48,4112.96 6325.52,4196 ; v1(4793,3643) 5120,3643 v1(5136,3627) ; v1(4998,3024) 5021.54,3000.46 v1(5398.46,3000.46) ; v1(5600,4150) 5646,4196 6325.52,4196 ; P1.35 P1.36 6325.52,4196
NetC1_1: C1.1 R2.2 U2.3 | length 1328.3
  Top Layer w10: U2.3 4360,3105 4320,3145 R2.2 4290,3472 4369.61,3551.6 C1.1
NetCx1_1: Cx1.1 R1.1 | length 105
  Top Layer w10: R1.1 4509.53,3580 Cx1.1
NetCx2_1: Cx2.1 U1.98 | length 1136.3
  Top Layer w10: Cx2.1 v1(4940,3157) ; U1.98 5319.72,3588.28 v1(5370,3538)
  Bottom Layer w10: v1(4940,3157) 5067.33,3157 5187.33,3277 5344,3277 5370,3303 v1(5370,3538)
NetCx3_1: Cx3.1 R1.2 | length 120
  Top Layer w10: Cx3.1 4509.53,3338 R1.2
NetCx4_2: Cx4.2 D1.1 R4.2 U3.11 | length 745.7
  Top Layer w10: Cx4.2 Cx4.2@3055.06,3921.5 ; R4.2 3148.77,3682.5 D1.1 Cx4.2@3055.06,3921.5 ; U3.11 3116.07,3982.5 Cx4.2@3055.06,3921.5
NetCx5_2: Cx5.2 D2.2 D3.2 F1.1 R5.1 R7.1 U4.6 | length 2694.5
  Top Layer w10: F1.1 3322.85,3435.23 R5.1 3378,3516 3379,3515 Cx5.2 ; R7.1 R7.1@3730,3540 ; v1(3759,3794) 3768,3785 3768,3609 3730,3571 R7.1@3730,3540 ; U4.6 3840,3962.5 3815,3937.5 3815,3801 3792,3778 3792,3602 R7.1@3730,3540 ; D2.2 D3.2
  Bottom Layer w10: F1.1 3316.62,3429 3620.71,3429 3759,3290.71 ; v1(3759,3794) 3759,3290.71 ; D3.2 3759,3290.71
NetCx6_1: Cx6.1 D3.1 D4.2 F2.1 R6.2 R7.2 U4.7 | length 2624
  Top Layer w10: Cx6.1 3235,3922.5 R6.2 3295,3751 3263.35,3719.35 3263.35,3544.35 3159,3440 3159,3296 3183,3272 3564.62,3272 F2.1 3630,3419 3600,3449 3600,3489 ; R7.2 3600,3489 ; U4.7 3936,3912.5 3938.37,3910.13 3938.37,3794.37 3925,3781 D3.1 ; D4.2 3925,3478.29 D3.1 ; 3600,3489 3616,3473 3871.71,3473 D3.1
NetD1_2: D1.2 R4.1 U3.8 U4.4 | length 2447.2
  Top Layer w10: D1.2 3122,3552.5 ; R4.1 3122,3552.5 ; U3.8 3033.5,4132.5 2996,4095 2996,3678.5 3122,3552.5 ; v1(3998,4004) 4006.5,4012.5 U4.4
  Bottom Layer w10: D1.2 3582.26,4004 v1(3998,4004)
NetF1_2: F1.2 P4.1 | length 325.5
  Top Layer w10: F1.2 3215,2352.5 P4.1
NetF2_2: F2.2 P4.2 | length 325.2
  Top Layer w10: P4.2 3485,2302.62 F2.2
NetU3_3: U3.3 U3.12 | length 204
  Top Layer w10: U3.12 U3.3
NetU3_6: U3.6 U3.9 | length 204
  Top Layer w10: U3.9 U3.6
NetU3_10: U3.10 U4.2 U4.3 | length 1148.5
  Top Layer w10: U3.10 3544.5,4032.5 3569,4057 3691,4057 3730,4096 v1(3730,4222) ; U4.3 U4.2 4129.5,3912.5 v1(4173,3956)
  Bottom Layer w10: v1(3730,4222) 3907,4222 v1(4173,3956)
NetU3_13: U3.13 U4.1 | length 733.1
  Top Layer w10: U3.13 3551.5,3882.5 3575,3906 3757,3906 3836,3985 3931,3985 4040,3876 4040,3862.5 U4.1
VCC: Cx5.1 P1.1 P1.2 R2.1 R3.1 R5.2 SW1.1 U1.10 U1.30 U1.31 U1.61 U1.80 U1.100 U2.1 U3.14 U4.8 | length 10970.4
  Top Layer w10: R5.2 3378,3646 3379,3645 Cx5.1 3435,3732 3448,3745 3448,3798 ; U3.14 3448,3798 ; U4.8 3845,3862.5 ; R2.1 R2.1@4420,3148 ; U2.1 4560,2821 4510.5,2870.5 4510.5,3042.5 4542.49,3074.49 4542.49,3102.49 SW1.1 4562,3148 R2.1@4420,3148 ; v1(5098,3697) 5123,3697 5190.15,3629.85 U1.10 ; U1.100 5280.35,3516 5280,3515.65 5280,3423.09 5359.09,3344 U1.30 ; v1(5359.09,2772) U1.30 ; U1.31 U1.30 ; v1(5655,4056) 5674.06,4036.94 U1.80 ; U1.61 5781,3531.43 5772,3522.43 5772,3501 5762,3491 5762,3310 5934,3138 v1(5934,2979) ; 3448,3798 3488,3758 3728,3758 3752,3734 3752,3645 3694,3587 3694,3489 3808,3489 3845,3526 R3.1 3845,3862.5 ; 3845,3862.5 3840,3862.5 3831,3871.5 3831,3930 3836,3935 3936.13,3935 4033.13,3838 4191,3838 4284,3931 4416,3931 4432,3915 4432,3836 4420,3824 R2.1@4420,3148
  Bottom Layer w10: U2.1 4560,2724 4592.53,2756.53 ; SW1.1 4575,3479.39 4792.61,3697 v1(5098,3697) 5133,3697 5380,3944 5380,3978 5427,4025 5624,4025 v1(5655,4056) ; v1(5359.09,2772) 4608,2772 4592.53,2756.53 ; v1(5934,2979) 6205,2708 6294.81,2708 6306.58,2696.23 ; P1.1 P1.2 6362.33,2640.48 6306.58,2696.23 ; 4592.53,2756.53 5293.48,2756.53 5342.01,2708 5727.23,2708 5739,2696.23 6306.58,2696.23
XTAL1: Cx1.2 U1.34 X1.2 | length 1754.4
  Top Layer w10: Cx1.2 Cx1.2@4647.57,3633.34 ; X1.2 4724.53,3633.34 Cx1.2@4647.57,3633.34 ; v1(4927,3033) 4878,3082 4878,3165.03 4843.03,3200 4843.03,3437.88 Cx1.2@4647.57,3633.34 ; v1(5437.83,2958.83) U1.34
  Bottom Layer w10: v1(4927,3033) 4995.54,2964.46 5432.2,2964.46 v1(5437.83,2958.83)
XTAL2: Cx3.2 U1.33 X1.1 | length 1090.5
  Top Layer w10: Cx3.2 4709.53,3278.34 X1.1 ; v1(5332,3464) 5418.15,3377.85 U1.33
  Bottom Layer w10: X1.1 4906.87,3251 5105.07,3251 5318.07,3464 v1(5332,3464)
pads on no net: SW1.3 SW1.4 U1.4 U1.8 U1.9 U1.14 U1.28 U1.29 U1.47 U1.48 U1.49 U1.65 U1.66 U1.67 U1.68 U1.69 U1.79 U2.None U3.1 U3.2

## Text inside footprints (layer, text, board x,y; h text height)
P1: Top Overlay "36" at 6490,4400.48 h50 r90; Top Overlay "35" at 6590,4400.48 h50 r90; Top Overlay "1" at 6590,2540.48 h50 r90; Top Overlay "2" at 6490,2520.48 h50 r90
U2: Mechanical 4 "1" at 4585.24,2389.84 h73.82 r180; Mechanical 4 "2" at 4485.04,2389.84 h73.82 r180; Mechanical 4 "3" at 4384.98,2389.84 h73.82 r180; Mechanical 4 "1" at 4585.24,2389.84 h73.82 r180; Mechanical 4 "2" at 4485.04,2389.84 h73.82 r180; Mechanical 4 "3" at 4384.98,2389.84 h73.82 r180